# Altium PCB RF315.PcbDoc (part 2 of 3)
Units mm, origin at the board's own origin, x right, y up, seen from the top; angles counter-clockwise.
Board outline 104 x 96 mm, 2 copper layers (Top Layer, Bottom Layer); 249 components, 20 nets, 1048 pads, 153 vias.
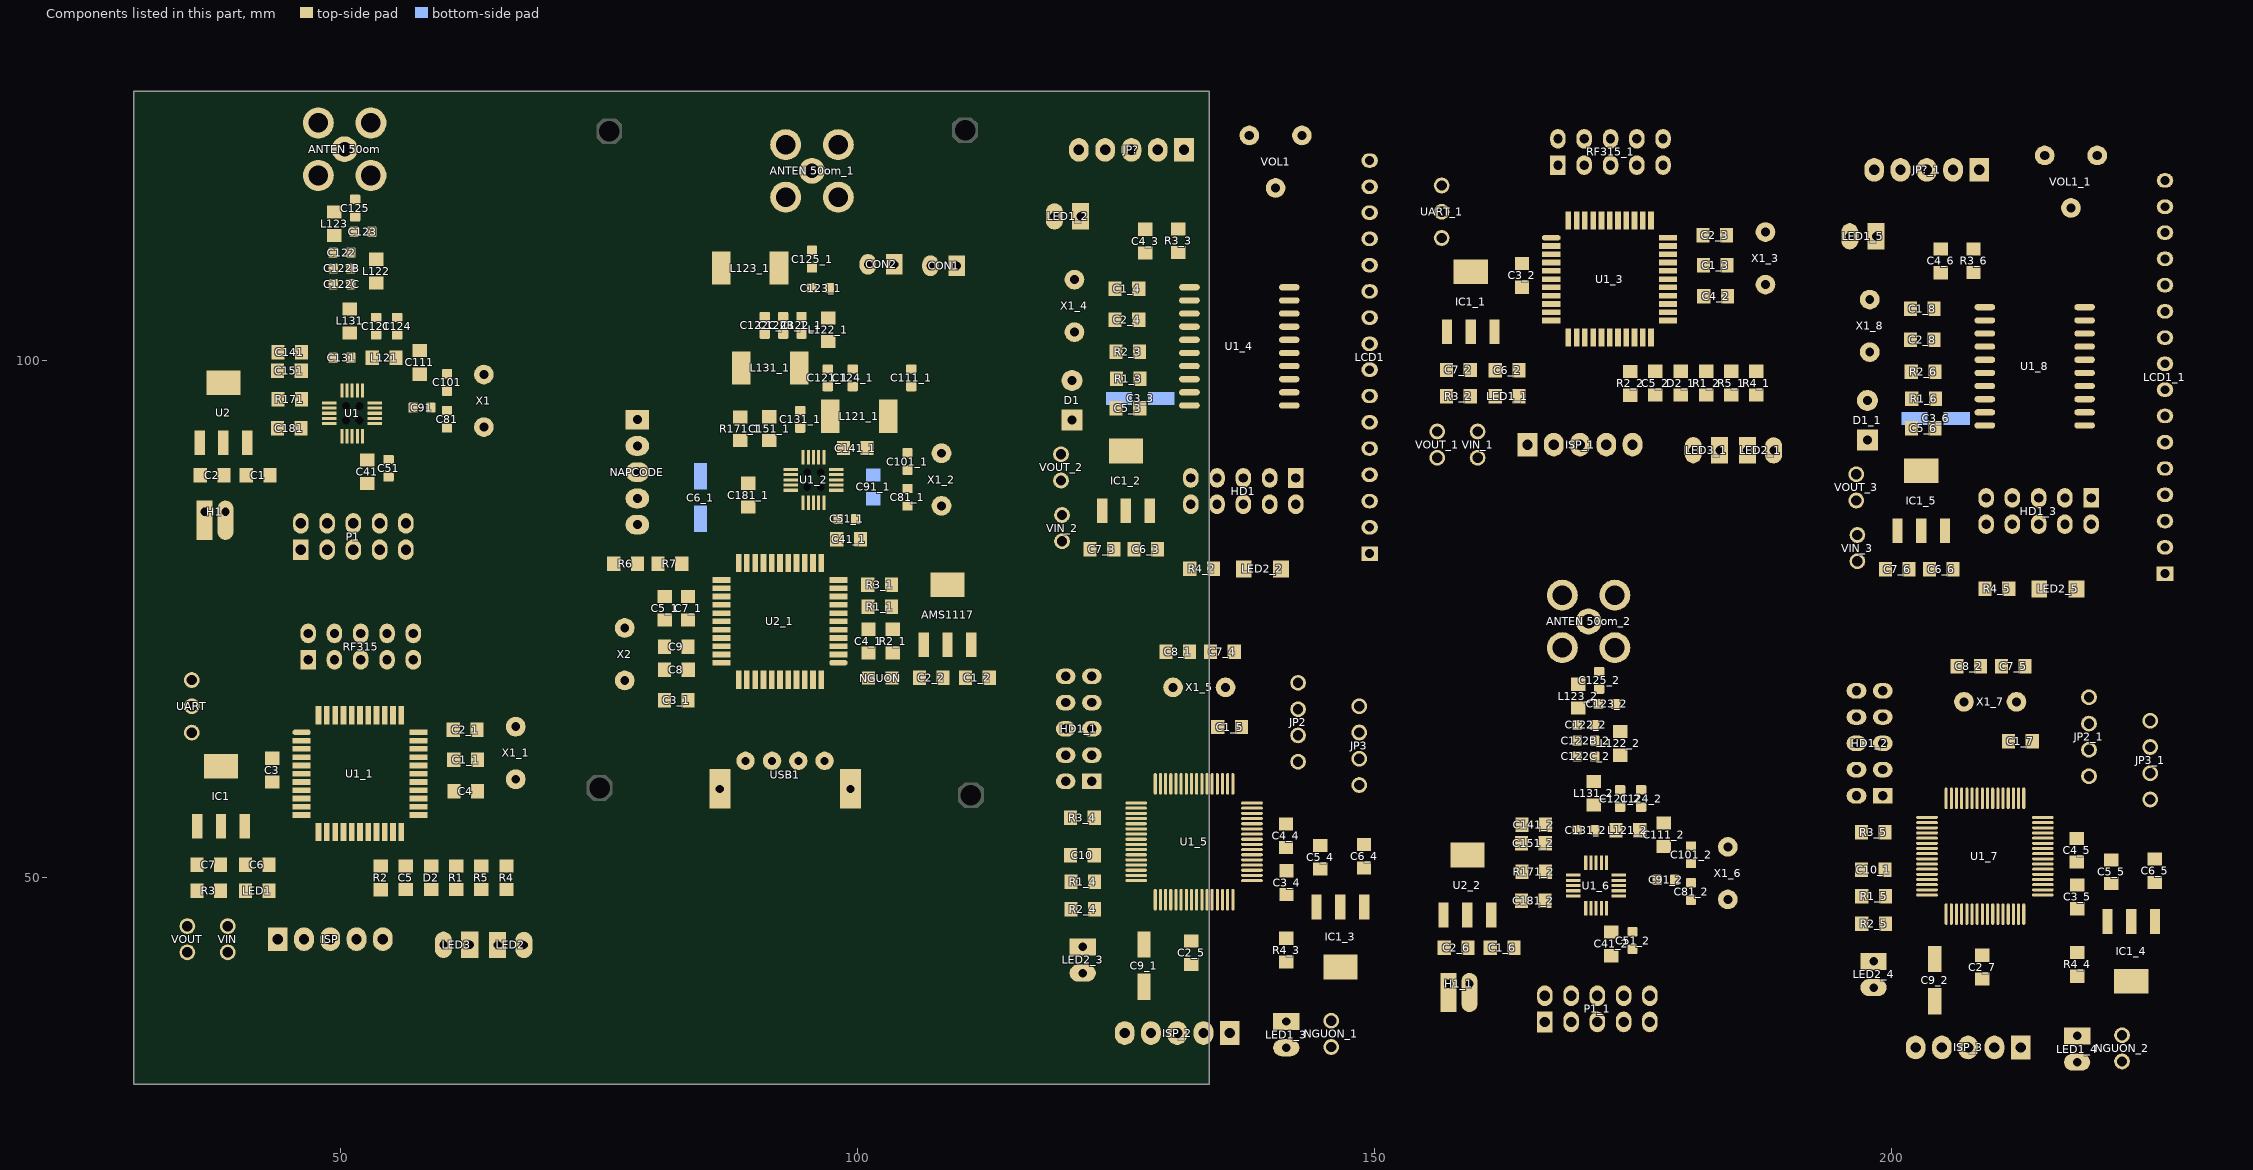
[diagram p2: the components of this part, seen from the top]

## Via types
v1: diameter 1.27, hole 0.711, Top Layer to Bottom Layer, 103 vias
v2: diameter 1.1, hole 0.7, Top Layer to Bottom Layer, 35 vias
v3: diameter 1, hole 0.7, Top Layer to Bottom Layer, 5 vias
v4: diameter 1, hole 0.6, Top Layer to Bottom Layer, 3 vias
v5: diameter 1.2, hole 0.7, Top Layer to Bottom Layer, 2 vias
v6: diameter 1.1, hole 0.711, Top Layer to Bottom Layer, 2 vias
v7: diameter 1, hole 0.711, Top Layer to Bottom Layer, 2 vias
v8: diameter 1.143, hole 0.711, Top Layer to Bottom Layer, 1 vias

## Nets (pads, with @x,y where several pads share a name; then routed paths per layer and width w, separated by ;. In a path a pad name is that pad's centre, name@x,y a point inside that pad or via, vN(x,y) a via of type N, cw(c..) or ccw(c..) an arc to the next point about the centre after c; other vN are vias at no path point) (continued)
copper on no net: | length 5093.7
  Top Layer w0.025: 60.162,118.632 60.238,118.632 ; 60.162,118.657 60.238,118.657 ; 60.162,118.683 60.238,118.683 ; 60.162,118.708 60.238,118.708 ; 60.162,118.733 60.238,118.733 ; 60.162,118.759 60.238,118.759 ; 60.162,118.784 60.238,118.784 ; 60.162,118.81 60.238,118.81 ; 60.162,118.835 60.238,118.835 ; 60.162,118.86 60.238,118.86 ; 60.162,118.886 60.238,118.886 ; 60.162,118.911 60.238,118.911 ; 60.162,118.937 60.238,118.937 ; 60.162,118.962 60.238,118.962 ; 60.162,118.987 60.238,118.987 ; 60.162,119.013 60.238,119.013 ; 60.162,119.038 60.238,119.038 ; 60.162,119.064 60.238,119.064 ; 60.162,119.089 60.238,119.089 ; 60.162,119.114 60.238,119.114 ; 60.162,119.14 60.238,119.14 ; 60.162,119.165 60.238,119.165 ; 60.162,119.191 60.238,119.191 ; 60.162,119.216 60.238,119.216 ; 60.162,119.241 60.238,119.241 ; 60.162,119.267 60.238,119.267 ; 60.162,119.292 60.238,119.292 ; 60.162,119.318 60.238,119.318 ; 60.162,119.343 60.238,119.343 ; 60.162,119.368 60.238,119.368 ; 60.162,119.394 60.238,119.394 ; 60.162,119.419 60.238,119.419 ; 60.162,119.445 60.238,119.445 ; 60.162,119.47 60.238,119.47 ; 60.162,119.495 60.238,119.495 ; 60.162,119.521 60.238,119.521 ; 60.162,119.546 60.238,119.546 ; 60.162,119.572 60.238,119.572 ; 60.162,119.597 60.238,119.597 ; 60.162,119.622 60.238,119.622 ; 60.162,119.648 60.238,119.648 ; 60.162,119.673 60.238,119.673 ; 60.162,119.699 60.238,119.699 ; 60.162,119.724 60.238,119.724 ; 60.162,119.749 60.238,119.749 ; 60.162,119.775 60.238,119.775 ; 60.162,119.8 60.238,119.8 ; 60.162,119.826 60.238,119.826 ; 60.162,119.851 60.238,119.851 ; 60.162,119.876 60.238,119.876 ; 60.162,119.902 60.238,119.902 ; 60.162,119.927 60.238,119.927 ; 60.162,119.953 60.238,119.953 ; 60.162,119.978 60.238,119.978 ; 60.162,120.003 60.238,120.003 ; 60.162,120.029 60.238,120.029 ; 60.162,120.054 60.238,120.054 ; 60.162,120.08 60.238,120.08 ; 60.162,120.105 60.238,120.105 ; 60.162,120.13 60.238,120.13 ; 60.162,120.156 60.238,120.156 ; 60.162,120.181 60.238,120.181 ; 60.162,120.207 60.238,120.207 ; 60.162,120.232 60.238,120.232 ; 60.162,120.257 60.238,120.257 ; 60.162,120.283 60.238,120.283 ; 60.162,120.308 60.238,120.308 ; 60.162,120.334 60.238,120.334 ; 60.162,120.359 60.238,120.359 ; 60.162,120.384 60.238,120.384 ; 60.162,120.41 60.238,120.41 ; 60.162,120.435 60.238,120.435 ; 60.162,120.461 60.238,120.461 ; 60.162,120.486 60.238,120.486 ; 60.162,120.511 60.238,120.511 ; 60.162,120.537 60.238,120.537 ; 60.162,120.562 60.238,120.562 ; 60.162,120.588 60.238,120.588 ; 60.162,120.613 60.238,120.613 ; 60.162,120.638 60.238,120.638 ; 60.162,120.664 60.238,120.664 ; 60.162,120.689 60.238,120.689 ; 60.162,120.715 60.238,120.715 ; 60.162,120.74 60.238,120.74 ; 60.162,120.765 60.238,120.765 ; 60.162,120.791 60.238,120.791 ; 60.162,120.816 60.238,120.816 ; 60.162,120.842 60.238,120.842 ; 60.162,120.867 60.238,120.867 ; 60.162,120.892 60.238,120.892 ; 60.162,120.918 60.238,120.918 ; 60.162,120.943 60.238,120.943 ; 60.162,120.969 60.238,120.969 ; 60.162,120.994 60.238,120.994 ; 60.162,121.019 60.238,121.019 ; 60.162,121.045 60.238,121.045 ; 60.162,121.07 60.238,121.07 ; 60.162,121.096 60.238,121.096 ; 60.162,121.121 60.238,121.121 ; 60.162,121.146 60.238,121.146 ; 60.162,121.172 60.238,121.172 ; 60.162,121.197 60.238,121.197 ; 60.162,121.223 60.238,121.223 ; 60.162,121.248 60.238,121.248 ; 60.162,121.273 60.238,121.273 ; 60.162,121.299 60.238,121.299 ; 60.162,121.324 60.238,121.324 ; 60.162,121.35 60.238,121.35 ; 60.162,121.375 60.238,121.375 ; 60.162,121.4 60.238,121.4 ; 60.162,121.426 60.238,121.426 ; 60.162,121.451 60.238,121.451 ; 60.162,121.477 60.238,121.477 ; 60.162,121.502 60.238,121.502 ; 60.162,121.527 60.238,121.527 ; 60.162,121.553 60.238,121.553 ; 60.162,121.578 60.238,121.578 ; 60.162,121.604 60.238,121.604 ; 60.162,121.629 60.238,121.629 ; 60.162,121.654 60.238,121.654 ; 60.162,121.68 60.238,121.68 ; 60.162,121.705 60.238,121.705 ; 60.162,121.731 60.238,121.731 ; 60.162,121.756 60.238,121.756 ; 60.162,121.781 60.238,121.781 ; 60.162,121.807 60.238,121.807 ; 60.162,121.832 60.238,121.832 ; 60.162,121.858 60.238,121.858 ; 60.162,121.883 60.238,121.883 ; 60.162,121.908 60.238,121.908 ; 60.162,121.934 60.238,121.934 ; 60.162,121.959 60.238,121.959 ; 60.162,121.985 60.238,121.985 ; 60.162,122.01 60.238,122.01 ; 60.162,122.035 60.238,122.035 ; 60.162,122.061 60.238,122.061 ; 60.162,122.086 60.238,122.086 ; 60.162,122.112 60.238,122.112 ; 60.162,122.137 60.238,122.137 ; 60.162,122.162 60.238,122.162 ; 60.162,122.188 60.238,122.188 ; 60.162,122.213 60.238,122.213 ; 60.162,122.239 60.238,122.239 ; 60.162,122.264 60.238,122.264 ; 60.162,122.289 60.238,122.289 ; 60.162,122.315 60.238,122.315 ; 60.162,122.34 60.263,122.34 ; 60.187,118.53 60.289,118.53 ; 60.187,118.556 60.263,118.556 ; 60.187,118.581 60.263,118.581 ; 60.187,118.606 60.263,118.606 ; 60.187,122.366 60.263,122.366 ; 60.187,122.391 60.263,122.391 ; 60.187,122.416 60.289,122.416 ; 60.212,118.479 60.289,118.479 ; 60.212,118.505 60.289,118.505 ; 60.212,122.442 60.289,122.442 ; 60.212,122.467 60.289,122.467 ; 60.212,122.493 60.314,122.493 ; 60.238,118.429 60.314,118.429 ; 60.238,118.454 60.314,118.454 ; 60.238,122.518 60.314,122.518 ; 60.238,122.543 60.339,122.543 ; 60.263,118.378 60.365,118.378 ; 60.263,118.403 60.339,118.403 ; 60.263,122.569 60.339,122.569 ; 60.263,122.594 60.365,122.594 ; 60.289,118.327 60.39,118.327 ; 60.289,118.352 60.365,118.352 ; 60.289,122.62 60.39,122.62 ; 60.314,118.302 60.416,118.302 ; 60.314,122.645 60.416,122.645 ; 60.314,122.67 60.416,122.67 ; 60.339,118.251 60.441,118.251 ; 60.339,118.276 60.441,118.276 ; 60.339,122.696 60.441,122.696 ; 60.365,118.225 60.466,118.225 ; 60.365,122.721 60.466,122.721 ; 60.39,118.2 60.517,118.2 ; 60.39,122.747 60.492,122.747 ; 60.416,118.175 60.543,118.175 ; 60.416,122.772 60.543,122.772 ; 60.441,118.149 60.568,118.149 ; 60.441,122.797 60.568,122.797 ; 60.466,122.823 60.593,122.823 ; 60.492,118.124 60.619,118.124 ; 60.492,122.848 60.644,122.848 ; 60.517,118.098 60.644,118.098 ; 60.543,118.073 60.72,118.073 ; 60.543,122.874 60.695,122.874 ; 60.568,122.899 60.771,122.899 ; 60.593,118.048 60.771,118.048 ; 60.593,122.264 61.152,122.264 ; 60.593,122.289 61.127,122.289 ; 60.593,122.315 61.101,122.315 ; 60.593,122.34 61.101,122.34 ; 60.593,122.366 61.101,122.366 ; 60.593,122.391 61.101,122.391 ; 60.593,122.416 61.076,122.416 ; 60.619,122.213 61.203,122.213 ; 60.619,122.239 61.178,122.239 ; 60.619,122.442 61.076,122.442 ; 60.619,122.467 61.051,122.467 ; 60.619,122.924 60.847,122.924 ; 60.644,118.022 60.873,118.022 ; 60.644,122.162 61.254,122.162 ; 60.644,122.188 61.228,122.188 ; 60.644,122.493 61.051,122.493 ; 60.67,118.454 60.746,118.454 ; 60.67,118.479 60.898,118.479 ; 60.67,118.505 61.051,118.505 ; 60.67,118.53 61.203,118.53 ; 60.67,118.556 61.228,118.556 ; 60.67,122.137 61.279,122.137 ; 60.67,122.518 61.025,122.518 ; 60.67,122.95 64.708,122.95 ; 60.695,117.997 64.708,117.997 ; 60.695,118.581 61.254,118.581 ; 60.695,118.606 61.279,118.606 ; 60.695,118.632 61.305,118.632 ; 60.695,118.657 61.33,118.657 ; 60.695,118.683 61.355,118.683 ; 60.695,118.708 61.381,118.708 ; 60.695,122.543 60.974,122.543 ; 60.72,118.733 61.406,118.733 ; 60.72,118.759 61.432,118.759 ; 60.72,118.784 61.457,118.784 ; 60.72,118.81 61.482,118.81 ; 60.72,118.835 61.508,118.835 ; 60.72,118.86 61.533,118.86 ; 60.72,122.112 61.305,122.112 ; 60.746,118.886 61.559,118.886 ; 60.746,118.911 61.584,118.911 ; 60.746,118.937 61.609,118.937 ; 60.746,118.962 61.635,118.962 ; 60.746,122.569 60.924,122.569 ; 60.746,122.975 64.657,122.975 ; 60.771,117.971 64.632,117.971 ; 60.771,118.987 61.66,118.987 ; 60.771,122.086 61.33,122.086 ; 60.797,119.013 61.686,119.013 ; 60.822,119.038 61.711,119.038 ; 60.822,123.001 64.556,123.001 ; 60.847,117.946 64.53,117.946 ; 60.847,119.064 61.736,119.064 ; 60.847,120.842 60.898,120.842 ; 60.873,119.089 61.762,119.089 ; 60.873,120.867 60.974,120.867 ; 60.873,122.061 61.355,122.061 ; 60.898,119.114 61.787,119.114 ; 60.898,120.892 61.051,120.892 ; 60.898,122.035 61.381,122.035 ; 60.924,119.14 61.813,119.14 ; 60.924,120.918 61.127,120.918 ; 60.924,122.01 61.406,122.01 ; 60.949,119.165 61.838,119.165 ; 60.949,120.943 61.203,120.943 ; 60.949,121.985 61.432,121.985 ; 60.974,119.191 61.863,119.191 ; 60.974,120.969 61.254,120.969 ; 60.974,121.959 61.457,121.959 ; 61,119.216 61.889,119.216 ; 61,120.994 61.33,120.994 ; 61,121.934 61.482,121.934 ; 61.025,119.241 61.914,119.241 ; 61.025,121.019 61.406,121.019 ; 61.025,121.908 61.508,121.908 ; 61.051,119.267 61.94,119.267 ; 61.051,121.045 61.432,121.045 ; 61.051,121.883 61.533,121.883 ; 61.076,119.292 61.965,119.292 ; 61.076,121.07 61.457,121.07 ; 61.076,121.858 61.559,121.858 ; 61.101,119.318 61.99,119.318 ; 61.101,121.096 61.482,121.096 ; 61.101,121.832 61.584,121.832 ; 61.127,119.343 62.016,119.343 ; 61.127,121.121 61.508,121.121 ; 61.127,121.807 61.609,121.807 ; 61.152,119.368 62.041,119.368 ; 61.152,121.146 61.533,121.146 ; 61.152,121.781 61.635,121.781 ; 61.178,119.394 62.067,119.394 ; 61.178,121.172 62.448,121.172 ; 61.178,121.756 61.66,121.756 ; 61.203,119.419 62.092,119.419 ; 61.203,121.197 62.422,121.197 ; 61.203,121.731 61.686,121.731 ; 61.228,119.445 62.117,119.445 ; 61.228,121.223 62.397,121.223 ; 61.228,121.705 62.092,121.705 ; 61.254,119.47 62.143,119.47 ; 61.254,121.248 62.371,121.248 ; 61.254,121.68 62.067,121.68 ; 61.279,119.495 62.168,119.495 ; 61.279,121.273 62.346,121.273 ; 61.279,121.654 62.041,121.654 ; 61.305,119.521 62.194,119.521 ; 61.305,121.299 62.321,121.299 ; 61.305,121.629 62.016,121.629 ; 61.33,119.546 62.219,119.546 ; 61.33,121.324 62.295,121.324 ; 61.33,121.604 62.016,121.604 ; 61.355,119.572 62.244,119.572 ; 61.355,121.35 62.27,121.35 ; 61.355,121.578 62.041,121.578 ; 61.381,119.597 62.27,119.597 ; 61.381,121.375 62.244,121.375 ; 61.381,121.553 62.067,121.553 ; 61.406,119.622 62.295,119.622 ; 61.406,121.4 62.219,121.4 ; 61.406,121.527 62.092,121.527 ; 61.432,119.648 62.321,119.648 ; 61.432,121.426 62.194,121.426 ; 61.432,121.502 62.117,121.502 ; 61.457,119.673 62.346,119.673 ; 61.457,121.451 62.168,121.451 ; 61.457,121.477 62.143,121.477 ; 61.482,119.699 62.371,119.699 ; 61.508,119.724 62.397,119.724 ; 61.533,119.749 62.422,119.749 ; 61.559,119.775 62.448,119.775 ; 61.584,119.8 62.473,119.8 ; 61.584,121.146 62.473,121.146 ; 61.609,119.826 62.498,119.826 ; 61.609,121.121 62.498,121.121 ; 61.635,119.851 62.524,119.851 ; 61.635,121.096 62.524,121.096 ; 61.66,119.876 62.549,119.876 ; 61.66,121.07 62.549,121.07 ; 61.686,119.902 62.575,119.902 ; 61.686,121.045 62.575,121.045 ; 61.711,119.927 62.6,119.927 ; 61.711,121.019 62.6,121.019 ; 61.736,119.953 62.625,119.953 ; 61.736,120.994 62.625,120.994 ; 61.736,121.731 62.117,121.731 ; 61.762,119.978 62.651,119.978 ; 61.762,120.969 62.651,120.969 ; 61.762,121.756 62.143,121.756 ; 61.787,120.003 62.676,120.003 ; 61.787,120.943 62.676,120.943 ; 61.787,121.781 62.168,121.781 ; 61.813,120.029 63.591,120.029 ; 61.813,120.918 63.591,120.918 ; 61.813,121.807 62.168,121.807 ; 61.838,120.054 63.565,120.054 ; 61.838,120.892 63.565,120.892 ; 61.838,121.832 62.168,121.832 ; 61.863,120.08 63.54,120.08 ; 61.863,120.867 63.54,120.867 ; 61.863,121.858 62.194,121.858 ; 61.889,120.105 63.514,120.105 ; 61.889,120.842 63.514,120.842 ; 61.889,121.883 62.194,121.883 ; 61.914,120.13 63.489,120.13 ; 61.914,120.816 63.489,120.816 ; 61.914,121.908 62.194,121.908 ; 61.94,120.156 63.464,120.156 ; 61.94,120.791 63.464,120.791 ; 61.94,121.934 62.219,121.934 ; 61.965,120.181 63.438,120.181 ; 61.965,120.765 63.438,120.765 ; 61.965,121.959 62.219,121.959 ; 61.99,120.207 63.413,120.207 ; 61.99,120.74 63.413,120.74 ; 61.99,121.985 62.244,121.985 ; 62.016,120.232 63.387,120.232 ; 62.016,120.715 63.387,120.715 ; 62.016,122.01 62.244,122.01 ; 62.041,120.257 63.362,120.257 ; 62.041,120.689 63.362,120.689 ; 62.041,122.035 62.244,122.035 ; 62.067,120.283 63.337,120.283 ; 62.067,120.664 63.337,120.664 ; 62.067,122.061 62.27,122.061 ; 62.092,120.308 63.311,120.308 ; 62.092,120.638 63.311,120.638 ; 62.092,122.086 62.27,122.086 ; 62.117,120.334 63.286,120.334 ; 62.117,120.613 63.286,120.613 ; 62.117,122.112 62.27,122.112 ; 62.143,120.359 63.26,120.359 ; 62.143,120.588 63.26,120.588 ; 62.143,122.137 62.295,122.137 ; 62.168,120.384 63.235,120.384 ; 62.168,120.562 63.235,120.562 ; 62.168,122.162 62.295,122.162 ; 62.194,120.41 63.21,120.41 ; 62.194,120.537 63.21,120.537 ; 62.194,122.188 62.295,122.188 ; 62.219,120.435 63.184,120.435 ; 62.219,120.511 63.184,120.511 ; 62.219,122.213 62.321,122.213 ; 62.244,120.461 63.159,120.461 ; 62.244,120.486 63.159,120.486 ; 62.244,122.239 62.321,122.239 ; 62.27,122.264 62.321,122.264 ; 62.295,122.289 62.346,122.289 ; 62.321,122.315 62.346,122.315 ; 62.727,120.003 63.616,120.003 ; 62.727,120.943 63.616,120.943 ; 62.752,119.978 63.641,119.978 ; 62.752,120.969 63.641,120.969 ; 62.778,119.953 63.667,119.953 ; 62.778,120.994 63.667,120.994 ; 62.803,119.927 63.692,119.927 ; 62.803,121.019 63.692,121.019 ; 62.829,119.902 63.718,119.902 ; 62.829,121.045 63.718,121.045 ; 62.854,119.876 63.743,119.876 ; 62.854,121.07 63.743,121.07 ; 62.879,119.851 63.768,119.851 ; 62.879,121.096 63.768,121.096 ; 62.905,119.826 63.794,119.826 ; 62.905,121.121 63.794,121.121 ; 62.93,119.8 63.819,119.8 ; 62.93,121.146 63.819,121.146 ; 62.956,119.775 63.845,119.775 ; 62.956,121.172 64.226,121.172 ; 62.981,119.749 63.87,119.749 ; 62.981,121.197 64.2,121.197 ; 63.006,119.724 63.895,119.724 ; 63.006,121.223 64.175,121.223 ; 63.032,119.699 63.921,119.699 ; 63.032,121.248 64.149,121.248 ; 63.057,119.673 63.946,119.673 ; 63.057,121.273 64.124,121.273 ; 63.057,122.264 63.133,122.264 ; 63.057,122.289 63.108,122.289 ; 63.057,122.315 63.083,122.315 ; 63.083,119.648 63.972,119.648 ; 63.083,121.299 64.099,121.299 ; 63.083,122.213 63.184,122.213 ; 63.083,122.239 63.159,122.239 ; 63.108,119.622 63.997,119.622 ; 63.108,121.324 64.073,121.324 ; 63.108,122.137 63.26,122.137 ; 63.108,122.162 63.235,122.162 ; 63.108,122.188 63.21,122.188 ; 63.133,119.597 64.022,119.597 ; 63.133,121.35 64.048,121.35 ; 63.133,122.061 63.337,122.061 ; 63.133,122.086 63.311,122.086 ; 63.133,122.112 63.286,122.112 ; 63.159,119.572 64.048,119.572 ; 63.159,121.375 64.022,121.375 ; 63.159,121.985 63.413,121.985 ; 63.159,122.01 63.387,122.01 ; 63.159,122.035 63.362,122.035 ; 63.184,119.546 64.073,119.546 ; 63.184,121.4 63.997,121.4 ; 63.184,121.908 63.489,121.908 ; 63.184,121.934 63.464,121.934 ; 63.184,121.959 63.438,121.959 ; 63.21,119.521 64.099,119.521 ; 63.21,121.426 63.972,121.426 ; 63.21,121.832 63.565,121.832 ; 63.21,121.858 63.54,121.858 ; 63.21,121.883 63.514,121.883 ; 63.235,119.495 64.124,119.495 ; 63.235,121.451 63.946,121.451 ; 63.235,121.756 63.641,121.756 ; 63.235,121.781 63.616,121.781 ; 63.235,121.807 63.591,121.807 ; 63.26,119.47 64.149,119.47 ; 63.26,121.477 63.946,121.477 ; 63.26,121.731 63.667,121.731 ; 63.286,119.445 64.175,119.445 ; 63.286,121.502 63.972,121.502 ; 63.286,121.705 64.175,121.705 ; 63.311,119.419 64.2,119.419 ; 63.311,121.527 63.997,121.527 ; 63.311,121.68 64.149,121.68 ; 63.337,119.394 64.226,119.394 ; 63.337,121.553 64.022,121.553 ; 63.337,121.654 64.124,121.654 ; 63.362,119.368 64.251,119.368 ; 63.362,121.578 64.048,121.578 ; 63.362,121.629 64.099,121.629 ; 63.387,119.343 64.276,119.343 ; 63.387,121.604 64.073,121.604 ; 63.413,119.318 64.302,119.318 ; 63.438,119.292 64.327,119.292 ; 63.464,119.267 64.353,119.267 ; 63.489,119.241 64.378,119.241 ; 63.514,119.216 64.403,119.216 ; 63.54,119.191 64.429,119.191 ; 63.565,119.165 64.454,119.165 ; 63.591,119.14 64.48,119.14 ; 63.616,119.114 64.505,119.114 ; 63.641,119.089 64.53,119.089 ; 63.667,119.064 64.556,119.064 ; 63.692,119.038 64.581,119.038 ; 63.718,119.013 64.607,119.013 ; 63.718,121.731 64.2,121.731 ; 63.743,118.987 64.632,118.987 ; 63.743,121.756 64.226,121.756 ; 63.768,118.962 64.657,118.962 ; 63.768,121.781 64.251,121.781 ; 63.794,118.937 64.657,118.937 ; 63.794,121.807 64.276,121.807 ; 63.819,118.911 64.657,118.911 ; 63.819,121.832 64.302,121.832 ; 63.845,118.886 64.657,118.886 ; 63.845,121.146 64.251,121.146 ; 63.845,121.858 64.327,121.858 ; 63.87,118.86 64.657,118.86 ; 63.87,121.121 64.276,121.121 ; 63.87,121.883 64.353,121.883 ; 63.895,118.835 64.683,118.835 ; 63.895,121.096 64.302,121.096 ; 63.895,121.908 64.378,121.908 ; 63.921,118.81 64.683,118.81 ; 63.921,121.07 64.327,121.07 ; 63.921,121.934 64.403,121.934 ; 63.946,118.784 64.683,118.784 ; 63.946,121.045 64.353,121.045 ; 63.946,121.959 64.429,121.959 ; 63.972,118.759 64.683,118.759 ; 63.972,121.985 64.454,121.985 ; 63.997,118.733 64.683,118.733 ; 63.997,121.019 64.378,121.019 ; 63.997,122.01 64.48,122.01 ; 64.022,118.708 64.683,118.708 ; 64.022,122.035 64.505,122.035 ; 64.048,118.683 64.708,118.683 ; 64.048,120.994 64.403,120.994 ; 64.048,122.061 64.53,122.061 ; 64.073,118.657 64.708,118.657 ; 64.073,122.086 64.632,122.086 ; 64.099,118.632 64.708,118.632 ; 64.099,122.112 64.683,122.112 ; 64.124,118.606 64.708,118.606 ; 64.124,120.969 64.429,120.969 ; 64.124,122.137 64.708,122.137 ; 64.149,118.581 64.708,118.581 ; 64.149,122.162 64.734,122.162 ; 64.175,118.556 64.708,118.556 ; 64.175,122.188 64.759,122.188 ; 64.2,118.53 64.734,118.53 ; 64.2,120.943 64.454,120.943 ; 64.2,122.213 64.784,122.213 ; 64.226,122.239 64.784,122.239 ; 64.251,122.264 64.81,122.264 ; 64.276,120.918 64.48,120.918 ; 64.276,122.289 64.81,122.289 ; 64.302,122.315 64.81,122.315 ; 64.302,122.34 64.81,122.34 ; 64.302,122.366 64.81,122.366 ; 64.302,122.391 64.81,122.391 ; 64.302,122.416 64.784,122.416 ; 64.327,118.505 64.734,118.505 ; 64.327,122.442 64.784,122.442 ; 64.327,122.467 64.759,122.467 ; 64.353,120.892 64.505,120.892 ; 64.353,122.493 64.759,122.493 ; 64.378,122.518 64.734,122.518 ; 64.403,122.543 64.683,122.543 ; 64.429,120.867 64.53,120.867 ; 64.454,122.569 64.632,122.569 ; 64.48,118.479 64.734,118.479 ; 64.505,120.842 64.53,120.842 ; 64.53,118.022 64.759,118.022 ; 64.556,122.924 64.784,122.924 ; 64.632,118.048 64.81,118.048 ; 64.632,118.454 64.734,118.454 ; 64.632,122.899 64.81,122.899 ; 64.683,118.073 64.861,118.073 ; 64.708,122.874 64.861,122.874 ; 64.734,118.098 64.886,118.098 ; 64.759,122.848 64.886,122.848 ; 64.784,118.124 64.911,118.124 ; 64.784,122.823 64.937,122.823 ; 64.835,118.149 64.937,118.149 ; 64.835,122.797 64.962,122.797 ; 64.861,118.175 64.988,118.175 ; 64.861,122.772 64.988,122.772 ; 64.886,118.2 65.013,118.2 ; 64.886,122.747 65.013,122.747 ; 64.911,118.225 65.013,118.225 ; 64.937,118.251 65.038,118.251 ; 64.937,122.721 65.038,122.721 ; 64.962,118.276 65.064,118.276 ; 64.962,122.67 65.064,122.67 ; 64.962,122.696 65.064,122.696 ; 64.988,118.302 65.089,118.302 ; 64.988,122.645 65.089,122.645 ; 65.013,118.327 65.115,118.327 ; 65.013,122.62 65.115,122.62 ; 65.038,118.352 65.115,118.352 ; 65.038,118.378 65.14,118.378 ; 65.038,122.569 65.14,122.569 ; 65.038,122.594 65.115,122.594 ; 65.064,118.403 65.14,118.403 ; 65.064,118.429 65.165,118.429 ; 65.064,122.543 65.14,122.543 ; 65.089,118.454 65.165,118.454 ; 65.089,118.479 65.191,118.479 ; 65.089,122.467 65.191,122.467 ; 65.089,122.493 65.165,122.493 ; 65.089,122.518 65.165,122.518 ; 65.115,118.505 65.191,118.505 ; 65.115,118.53 65.191,118.53 ; 65.115,122.416 65.191,122.416 ; 65.115,122.442 65.191,122.442 ; 65.14,118.556 65.216,118.556 ; 65.14,118.581 65.216,118.581 ; 65.14,118.606 65.216,118.606 ; 65.14,118.632 65.216,118.632 ; 65.14,122.315 65.242,122.315 ; 65.14,122.34 65.216,122.34 ; 65.14,122.366 65.216,122.366 ; 65.14,122.391 65.216,122.391 ; 65.165,118.657 65.242,118.657 ; 65.165,118.683 65.242,118.683 ; 65.165,118.708 65.242,118.708 ; 65.165,118.733 65.242,118.733 ; 65.165,118.759 65.242,118.759 ; 65.165,118.784 65.242,118.784 ; 65.165,118.81 65.242,118.81 ; 65.165,118.835 65.242,118.835 ; 65.165,118.86 65.242,118.86 ; 65.165,118.886 65.242,118.886 ; 65.165,118.911 65.242,118.911 ; 65.165,118.937 65.242,118.937 ; 65.165,118.962 65.242,118.962 ; 65.165,118.987 65.242,118.987 ; 65.165,119.013 65.242,119.013 ; 65.165,119.038 65.242,119.038 ; 65.165,119.064 65.242,119.064 ; 65.165,119.089 65.242,119.089 ; 65.165,119.114 65.242,119.114 ; 65.165,119.14 65.242,119.14 ; 65.165,119.165 65.242,119.165 ; 65.165,119.191 65.242,119.191 ; 65.165,119.216 65.242,119.216 ; 65.165,119.241 65.242,119.241 ; 65.165,119.267 65.242,119.267 ; 65.165,119.292 65.242,119.292 ; 65.165,119.318 65.242,119.318 ; 65.165,119.343 65.242,119.343 ; 65.165,119.368 65.242,119.368 ; 65.165,119.394 65.242,119.394 ; 65.165,119.419 65.242,119.419 ; 65.165,119.445 65.242,119.445 ; 65.165,119.47 65.242,119.47 ; 65.165,119.495 65.242,119.495 ; 65.165,119.521 65.242,119.521 ; 65.165,119.546 65.242,119.546 ; 65.165,119.572 65.242,119.572 ; 65.165,119.597 65.242,119.597 ; 65.165,119.622 65.242,119.622 ; 65.165,119.648 65.242,119.648 ; 65.165,119.673 65.242,119.673 ; 65.165,119.699 65.242,119.699 ; 65.165,119.724 65.242,119.724 ; 65.165,119.749 65.242,119.749 ; 65.165,119.775 65.242,119.775 ; 65.165,119.8 65.242,119.8 ; 65.165,119.826 65.242,119.826 ; 65.165,119.851 65.242,119.851 ; 65.165,119.876 65.242,119.876 ; 65.165,119.902 65.242,119.902 ; 65.165,119.927 65.242,119.927 ; 65.165,119.953 65.242,119.953 ; 65.165,119.978 65.242,119.978 ; 65.165,120.003 65.242,120.003 ; 65.165,120.029 65.242,120.029 ; 65.165,120.054 65.242,120.054 ; 65.165,120.08 65.242,120.08 ; 65.165,120.105 65.242,120.105 ; 65.165,120.13 65.242,120.13 ; 65.165,120.156 65.242,120.156 ; 65.165,120.181 65.242,120.181 ; 65.165,120.207 65.242,120.207 ; 65.165,120.232 65.242,120.232 ; 65.165,120.257 65.242,120.257 ; 65.165,120.283 65.242,120.283 ; 65.165,120.308 65.242,120.308 ; 65.165,120.334 65.242,120.334 ; 65.165,120.359 65.242,120.359 ; 65.165,120.384 65.242,120.384 ; 65.165,120.41 65.242,120.41 ; 65.165,120.435 65.242,120.435 ; 65.165,120.461 65.242,120.461 ; 65.165,120.486 65.242,120.486 ; 65.165,120.511 65.242,120.511 ; 65.165,120.537 65.242,120.537 ; 65.165,120.562 65.242,120.562 ; 65.165,120.588 65.242,120.588 ; 65.165,120.613 65.242,120.613 ; 65.165,120.638 65.242,120.638 ; 65.165,120.664 65.242,120.664 ; 65.165,120.689 65.242,120.689 ; 65.165,120.715 65.242,120.715 ; 65.165,120.74 65.242,120.74 ; 65.165,120.765 65.242,120.765 ; 65.165,120.791 65.242,120.791 ; 65.165,120.816 65.242,120.816 ; 65.165,120.842 65.242,120.842 ; 65.165,120.867 65.242,120.867 ; 65.165,120.892 65.242,120.892 ; 65.165,120.918 65.242,120.918 ; 65.165,120.943 65.242,120.943 ; 65.165,120.969 65.242,120.969 ; 65.165,120.994 65.242,120.994 ; 65.165,121.019 65.242,121.019 ; 65.165,121.045 65.242,121.045 ; 65.165,121.07 65.242,121.07 ; 65.165,121.096 65.242,121.096 ; 65.165,121.121 65.242,121.121 ; 65.165,121.146 65.242,121.146 ; 65.165,121.172 65.242,121.172 ; 65.165,121.197 65.242,121.197 ; 65.165,121.223 65.242,121.223 ; 65.165,121.248 65.242,121.248 ; 65.165,121.273 65.242,121.273 ; 65.165,121.299 65.242,121.299 ; 65.165,121.324 65.242,121.324 ; 65.165,121.35 65.242,121.35 ; 65.165,121.375 65.242,121.375 ; 65.165,121.4 65.242,121.4 ; 65.165,121.426 65.242,121.426 ; 65.165,121.451 65.242,121.451 ; 65.165,121.477 65.242,121.477 ; 65.165,121.502 65.242,121.502 ; 65.165,121.527 65.242,121.527 ; 65.165,121.553 65.242,121.553 ; 65.165,121.578 65.242,121.578 ; 65.165,121.604 65.242,121.604 ; 65.165,121.629 65.242,121.629 ; 65.165,121.654 65.242,121.654 ; 65.165,121.68 65.242,121.68 ; 65.165,121.705 65.242,121.705 ; 65.165,121.731 65.242,121.731 ; 65.165,121.756 65.242,121.756 ; 65.165,121.781 65.242,121.781 ; 65.165,121.807 65.242,121.807 ; 65.165,121.832 65.242,121.832 ; 65.165,121.858 65.242,121.858 ; 65.165,121.883 65.242,121.883 ; 65.165,121.908 65.242,121.908 ; 65.165,121.934 65.242,121.934 ; 65.165,121.959 65.242,121.959 ; 65.165,121.985 65.242,121.985 ; 65.165,122.01 65.242,122.01 ; 65.165,122.035 65.242,122.035 ; 65.165,122.061 65.242,122.061 ; 65.165,122.086 65.242,122.086 ; 65.165,122.112 65.242,122.112 ; 65.165,122.137 65.242,122.137 ; 65.165,122.162 65.242,122.162 ; 65.165,122.188 65.242,122.188 ; 65.165,122.213 65.242,122.213 ; 65.165,122.239 65.242,122.239 ; 65.165,122.264 65.242,122.264 ; 65.165,122.289 65.242,122.289 ; 180.456,72.963 180.532,72.963 ; 180.456,72.988 180.532,72.988 ; 180.456,73.013 180.532,73.013 ; 180.456,73.039 180.532,73.039 ; 180.456,73.064 180.532,73.064 ; 180.456,73.09 180.532,73.09 ; 180.456,73.115 180.532,73.115 ; 180.456,73.14 180.532,73.14 ; 180.456,73.166 180.532,73.166 ; 180.456,73.191 180.532,73.191 ; 180.456,73.217 180.532,73.217 ; 180.456,73.242 180.532,73.242 ; 180.456,73.267 180.532,73.267 ; 180.456,73.293 180.532,73.293 ; 180.456,73.318 180.532,73.318 ; 180.456,73.344 180.532,73.344 ; 180.456,73.369 180.532,73.369 ; 180.456,73.394 180.532,73.394 ; 180.456,73.42 180.532,73.42 ; 180.456,73.445 180.532,73.445 ; 180.456,73.471 180.532,73.471 ; 180.456,73.496 180.532,73.496 ; 180.456,73.521 180.532,73.521 ; 180.456,73.547 180.532,73.547 ; 180.456,73.572 180.532,73.572 ; 180.456,73.598 180.532,73.598 ; 180.456,73.623 180.532,73.623 ; 180.456,73.648 180.532,73.648 ; 180.456,73.674 180.532,73.674 ; 180.456,73.699 180.532,73.699 ; 180.456,73.725 180.532,73.725 ; 180.456,73.75 180.532,73.75 ; 180.456,73.775 180.532,73.775 ; 180.456,73.801 180.532,73.801 ; 180.456,73.826 180.532,73.826 ; 180.456,73.852 180.532,73.852 ; 180.456,73.877 180.532,73.877 ; 180.456,73.902 180.532,73.902 ; 180.456,73.928 180.532,73.928 ; 180.456,73.953 180.532,73.953 ; 180.456,73.979 180.532,73.979 ; 180.456,74.004 180.532,74.004 ; 180.456,74.029 180.532,74.029 ; 180.456,74.055 180.532,74.055 ; 180.456,74.08 180.532,74.08 ; 180.456,74.106 180.532,74.106 ; 180.456,74.131 180.532,74.131 ; 180.456,74.156 180.532,74.156 ; 180.456,74.182 180.532,74.182 ; 180.456,74.207 180.532,74.207 ; 180.456,74.233 180.532,74.233 ; 180.456,74.258 180.532,74.258 ; 180.456,74.283 180.532,74.283 ; 180.456,74.309 180.532,74.309 ; 180.456,74.334 180.532,74.334 ; 180.456,74.36 180.532,74.36 ; 180.456,74.385 180.532,74.385 ; 180.456,74.41 180.532,74.41 ; 180.456,74.436 180.532,74.436 ; 180.456,74.461 180.532,74.461 ; 180.456,74.487 180.532,74.487 ; 180.456,74.512 180.532,74.512 ; 180.456,74.537 180.532,74.537 ; 180.456,74.563 180.532,74.563 ; 180.456,74.588 180.532,74.588 ; 180.456,74.614 180.532,74.614 ; 180.456,74.639 180.532,74.639 ; 180.456,74.664 180.532,74.664 ; 180.456,74.69 180.532,74.69 ; 180.456,74.715 180.532,74.715 ; 180.456,74.741 180.532,74.741 ; 180.456,74.766 180.532,74.766 ; 180.456,74.791 180.532,74.791 ; 180.456,74.817 180.532,74.817 ; 180.456,74.842 180.532,74.842 ; 180.456,74.868 180.532,74.868 ; 180.456,74.893 180.532,74.893 ; 180.456,74.918 180.532,74.918 ; 180.456,74.944 180.532,74.944 ; 180.456,74.969 180.532,74.969 ; 180.456,74.995 180.532,74.995 ; 180.456,75.02 180.532,75.02 ; 180.456,75.045 180.532,75.045 ; 180.456,75.071 180.532,75.071 ; 180.456,75.096 180.532,75.096 ; 180.456,75.122 180.532,75.122 ; 180.456,75.147 180.532,75.147 ; 180.456,75.172 180.532,75.172 ; 180.456,75.198 180.532,75.198 ; 180.456,75.223 180.532,75.223 ; 180.456,75.249 180.532,75.249 ; 180.456,75.274 180.532,75.274 ; 180.456,75.299 180.532,75.299 ; 180.456,75.325 180.532,75.325 ; 180.456,75.35 180.532,75.35 ; 180.456,75.376 180.532,75.376 ; 180.456,75.401 180.532,75.401 ; 180.456,75.426 180.532,75.426 ; 180.456,75.452 180.532,75.452 ; 180.456,75.477 180.532,75.477 ; 180.456,75.503 180.532,75.503 ; 180.456,75.528 180.532,75.528 ; 180.456,75.553 180.532,75.553 ; 180.456,75.579 180.532,75.579 ; 180.456,75.604 180.532,75.604 ; 180.456,75.63 180.532,75.63 ; 180.456,75.655 180.532,75.655 ; 180.456,75.68 180.532,75.68 ; 180.456,75.706 180.532,75.706 ; 180.456,75.731 180.532,75.731 ; 180.456,75.757 180.532,75.757 ; 180.456,75.782 180.532,75.782 ; 180.456,75.807 180.532,75.807 ; 180.456,75.833 180.532,75.833 ; 180.456,75.858 180.532,75.858 ; 180.456,75.884 180.532,75.884 ; 180.456,75.909 180.532,75.909 ; 180.456,75.934 180.532,75.934 ; 180.456,75.96 180.532,75.96 ; 180.456,75.985 180.532,75.985 ; 180.456,76.011 180.532,76.011 ; 180.456,76.036 180.532,76.036 ; 180.456,76.061 180.532,76.061 ; 180.456,76.087 180.532,76.087 ; 180.456,76.112 180.532,76.112 ; 180.456,76.138 180.532,76.138 ; 180.456,76.163 180.532,76.163 ; 180.456,76.188 180.532,76.188 ; 180.456,76.214 180.532,76.214 ; 180.456,76.239 180.532,76.239 ; 180.456,76.265 180.532,76.265 ; 180.456,76.29 180.532,76.29 ; 180.456,76.315 180.532,76.315 ; 180.456,76.341 180.532,76.341 ; 180.456,76.366 180.532,76.366 ; 180.456,76.392 180.532,76.392 ; 180.456,76.417 180.532,76.417 ; 180.456,76.442 180.532,76.442 ; 180.456,76.468 180.532,76.468 ; 180.456,76.493 180.532,76.493 ; 180.456,76.519 180.532,76.519 ; 180.456,76.544 180.532,76.544 ; 180.456,76.569 180.532,76.569 ; 180.456,76.595 180.532,76.595 ; 180.456,76.62 180.532,76.62 ; 180.456,76.646 180.532,76.646 ; 180.456,76.671 180.558,76.671 ; 180.481,72.861 180.583,72.861 ; 180.481,72.886 180.558,72.886 ; 180.481,72.912 180.558,72.912 ; 180.481,72.937 180.558,72.937 ; 180.481,76.696 180.558,76.696 ; 180.481,76.722 180.558,76.722 ; 180.481,76.747 180.583,76.747 ; 180.507,72.81 180.583,72.81 ; 180.507,72.836 180.583,72.836 ; 180.507,76.773 180.583,76.773 ; 180.507,76.798 180.583,76.798 ; 180.507,76.823 180.608,76.823 ; 180.532,72.759 180.608,72.759 ; 180.532,72.785 180.608,72.785 ; 180.532,76.849 180.608,76.849 ; 180.532,76.874 180.634,76.874 ; 180.558,72.709 180.659,72.709 ; 180.558,72.734 180.634,72.734 ; 180.558,76.9 180.634,76.9 ; 180.558,76.925 180.659,76.925 ; 180.583,72.658 180.685,72.658 ; 180.583,72.683 180.659,72.683 ; 180.583,76.95 180.685,76.95 ; 180.608,72.632 180.71,72.632 ; 180.608,76.976 180.71,76.976 ; 180.608,77.001 180.71,77.001 ; 180.634,72.582 180.735,72.582 ; 180.634,72.607 180.735,72.607 ; 180.634,77.027 180.735,77.027 ; 180.659,72.556 180.761,72.556 ; 180.659,77.052 180.761,77.052 ; 180.685,72.531 180.812,72.531 ; 180.685,77.077 180.786,77.077 ; 180.71,72.505 180.837,72.505 ; 180.71,77.103 180.837,77.103 ; 180.735,72.48 180.862,72.48 ; 180.735,77.128 180.862,77.128 ; 180.761,77.154 180.888,77.154 ; 180.786,72.455 180.913,72.455 ; 180.786,77.179 180.939,77.179 ; 180.812,72.429 180.939,72.429 ; 180.837,72.404 181.015,72.404 ; 180.837,77.204 180.989,77.204 ; 180.862,77.23 181.066,77.23 ; 180.888,72.378 181.066,72.378 ; 180.888,76.595 181.447,76.595 ; 180.888,76.62 181.421,76.62 ; 180.888,76.646 181.396,76.646 ; 180.888,76.671 181.396,76.671 ; 180.888,76.696 181.396,76.696 ; 180.888,76.722 181.396,76.722 ; 180.888,76.747 181.37,76.747 ; 180.913,76.544 181.497,76.544 ; 180.913,76.569 181.472,76.569 ; 180.913,76.773 181.37,76.773 ; 180.913,76.798 181.345,76.798 ; 180.913,77.255 181.142,77.255 ; 180.939,72.353 181.167,72.353 ; 180.939,76.493 181.548,76.493 ; 180.939,76.519 181.523,76.519 ; 180.939,76.823 181.345,76.823 ; 180.964,72.785 181.04,72.785 ; 180.964,72.81 181.193,72.81 ; 180.964,72.836 181.345,72.836 ; 180.964,72.861 181.497,72.861 ; 180.964,72.886 181.523,72.886 ; 180.964,76.468 181.574,76.468 ; 180.964,76.849 181.32,76.849 ; 180.964,77.281 185.003,77.281 ; 180.989,72.328 185.003,72.328 ; 180.989,72.912 181.548,72.912 ; 180.989,72.937 181.574,72.937 ; 180.989,72.963 181.599,72.963 ; 180.989,72.988 181.624,72.988 ; 180.989,73.013 181.65,73.013 ; 180.989,73.039 181.675,73.039 ; 180.989,76.874 181.269,76.874 ; 181.015,73.064 181.701,73.064 ; 181.015,73.09 181.726,73.09 ; 181.015,73.115 181.751,73.115 ; 181.015,73.14 181.777,73.14 ; 181.015,73.166 181.802,73.166 ; 181.015,73.191 181.828,73.191 ; 181.015,76.442 181.599,76.442 ; 181.04,73.217 181.853,73.217 ; 181.04,73.242 181.878,73.242 ; 181.04,73.267 181.904,73.267 ; 181.04,73.293 181.929,73.293 ; 181.04,76.9 181.218,76.9 ; 181.04,77.306 184.952,77.306 ; 181.066,72.302 184.926,72.302 ; 181.066,73.318 181.955,73.318 ; 181.066,76.417 181.624,76.417 ; 181.091,73.344 181.98,73.344 ; 181.116,73.369 182.005,73.369 ; 181.116,77.331 184.85,77.331 ; 181.142,72.277 184.825,72.277 ; 181.142,73.394 182.031,73.394 ; 181.142,75.172 181.193,75.172 ; 181.167,73.42 182.056,73.42 ; 181.167,75.198 181.269,75.198 ; 181.167,76.392 181.65,76.392 ; 181.193,73.445 182.082,73.445 ; 181.193,75.223 181.345,75.223 ; 181.193,76.366 181.675,76.366 ; 181.218,73.471 182.107,73.471 ; 181.218,75.249 181.421,75.249 ; 181.218,76.341 181.701,76.341 ; 181.243,73.496 182.132,73.496 ; 181.243,75.274 181.497,75.274 ; 181.243,76.315 181.726,76.315 ; 181.269,73.521 182.158,73.521 ; 181.269,75.299 181.548,75.299 ; 181.269,76.29 181.751,76.29 ; 181.294,73.547 182.183,73.547 ; 181.294,75.325 181.624,75.325 ; 181.294,76.265 181.777,76.265 ; 181.32,73.572 182.209,73.572 ; 181.32,75.35 181.701,75.35 ; 181.32,76.239 181.802,76.239 ; 181.345,73.598 182.234,73.598 ; 181.345,75.376 181.726,75.376 ; 181.345,76.214 181.828,76.214 ; 181.37,73.623 182.259,73.623 ; 181.37,75.401 181.751,75.401 ; 181.37,76.188 181.853,76.188 ; 181.396,73.648 182.285,73.648 ; 181.396,75.426 181.777,75.426 ; 181.396,76.163 181.878,76.163 ; 181.421,73.674 182.31,73.674 ; 181.421,75.452 181.802,75.452 ; 181.421,76.138 181.904,76.138 ; 181.447,73.699 182.336,73.699 ; 181.447,75.477 181.828,75.477 ; 181.447,76.112 181.929,76.112 ; 181.472,73.725 182.361,73.725 ; 181.472,75.503 182.742,75.503 ; 181.472,76.087 181.955,76.087 ; 181.497,73.75 182.386,73.75 ; 181.497,75.528 182.717,75.528 ; 181.497,76.061 181.98,76.061 ; 181.523,73.775 182.412,73.775 ; 181.523,75.553 182.691,75.553 ; 181.523,76.036 182.386,76.036 ; 181.548,73.801 182.437,73.801 ; 181.548,75.579 182.666,75.579 ; 181.548,76.011 182.361,76.011 ; 181.574,73.826 182.463,73.826 ; 181.574,75.604 182.64,75.604 ; 181.574,75.985 182.336,75.985 ; 181.599,73.852 182.488,73.852 ; 181.599,75.63 182.615,75.63 ; 181.599,75.96 182.31,75.96 ; 181.624,73.877 182.513,73.877 ; 181.624,75.655 182.59,75.655 ; 181.624,75.934 182.31,75.934 ; 181.65,73.902 182.539,73.902 ; 181.65,75.68 182.564,75.68 ; 181.65,75.909 182.336,75.909 ; 181.675,73.928 182.564,73.928 ; 181.675,75.706 182.539,75.706 ; 181.675,75.884 182.361,75.884 ; 181.701,73.953 182.59,73.953 ; 181.701,75.731 182.513,75.731 ; 181.701,75.858 182.386,75.858 ; 181.726,73.979 182.615,73.979 ; 181.726,75.757 182.488,75.757 ; 181.726,75.833 182.412,75.833 ; 181.751,74.004 182.64,74.004 ; 181.751,75.782 182.463,75.782 ; 181.751,75.807 182.437,75.807 ; 181.777,74.029 182.666,74.029 ; 181.802,74.055 182.691,74.055 ; 181.828,74.08 182.717,74.08 ; 181.853,74.106 182.742,74.106 ; 181.878,74.131 182.767,74.131 ; 181.878,75.477 182.767,75.477 ; 181.904,74.156 182.793,74.156 ; 181.904,75.452 182.793,75.452 ; 181.929,74.182 182.818,74.182 ; 181.929,75.426 182.818,75.426 ; 181.955,74.207 182.844,74.207 ; 181.955,75.401 182.844,75.401 ; 181.98,74.233 182.869,74.233 ; 181.98,75.376 182.869,75.376 ; 182.005,74.258 182.894,74.258 ; 182.005,75.35 182.894,75.35 ; 182.031,74.283 182.92,74.283 ; 182.031,75.325 182.92,75.325 ; 182.031,76.061 182.412,76.061 ; 182.056,74.309 182.945,74.309 ; 182.056,75.299 182.945,75.299 ; 182.056,76.087 182.437,76.087 ; 182.082,74.334 182.971,74.334 ; 182.082,75.274 182.971,75.274 ; 182.082,76.112 182.463,76.112 ; 182.107,74.36 183.885,74.36 ; 182.107,75.249 183.885,75.249 ; 182.107,76.138 182.463,76.138 ; 182.132,74.385 183.86,74.385 ; 182.132,75.223 183.86,75.223 ; 182.132,76.163 182.463,76.163 ; 182.158,74.41 183.834,74.41 ; 182.158,75.198 183.834,75.198 ; 182.158,76.188 182.488,76.188 ; 182.183,74.436 183.809,74.436 ; 182.183,75.172 183.809,75.172 ; 182.183,76.214 182.488,76.214 ; 182.209,74.461 183.783,74.461 ; 182.209,75.147 183.783,75.147 ; 182.209,76.239 182.488,76.239 ; 182.234,74.487 183.758,74.487 ; 182.234,75.122 183.758,75.122 ; 182.234,76.265 182.513,76.265 ; 182.259,74.512 183.733,74.512 ; 182.259,75.096 183.733,75.096 ; 182.259,76.29 182.513,76.29 ; 182.285,74.537 183.707,74.537 ; 182.285,75.071 183.707,75.071 ; 182.285,76.315 182.539,76.315 ; 182.31,74.563 183.682,74.563 ; 182.31,75.045 183.682,75.045 ; 182.31,76.341 182.539,76.341 ; 182.336,74.588 183.656,74.588 ; 182.336,75.02 183.656,75.02 ; 182.336,76.366 182.539,76.366 ; 182.361,74.614 183.631,74.614 ; 182.361,74.995 183.631,74.995 ; 182.361,76.392 182.564,76.392 ; 182.386,74.639 183.606,74.639 ; 182.386,74.969 183.606,74.969 ; 182.386,76.417 182.564,76.417 ; 182.412,74.664 183.58,74.664 ; 182.412,74.944 183.58,74.944 ; 182.412,76.442 182.564,76.442 ; 182.437,74.69 183.555,74.69 ; 182.437,74.918 183.555,74.918 ; 182.437,76.468 182.59,76.468 ; 182.463,74.715 183.529,74.715 ; 182.463,74.893 183.529,74.893 ; 182.463,76.493 182.59,76.493 ; 182.488,74.741 183.504,74.741 ; 182.488,74.868 183.504,74.868 ; 182.488,76.519 182.59,76.519 ; 182.513,74.766 183.479,74.766 ; 182.513,74.842 183.479,74.842 ; 182.513,76.544 182.615,76.544 ; 182.539,74.791 183.453,74.791 ; 182.539,74.817 183.453,74.817 ; 182.539,76.569 182.615,76.569 ; 182.564,76.595 182.615,76.595 ; 182.59,76.62 182.64,76.62 ; 182.615,76.646 182.64,76.646 ; 183.021,74.334 183.91,74.334 ; 183.021,75.274 183.91,75.274 ; 183.047,74.309 183.936,74.309 ; 183.047,75.299 183.936,75.299 ; 183.072,74.283 183.961,74.283 ; 183.072,75.325 183.961,75.325 ; 183.098,74.258 183.987,74.258 ; 183.098,75.35 183.987,75.35 ; 183.123,74.233 184.012,74.233 ; 183.123,75.376 184.012,75.376 ; 183.148,74.207 184.037,74.207 ; 183.148,75.401 184.037,75.401 ; 183.174,74.182 184.063,74.182 ; 183.174,75.426 184.063,75.426 ; 183.199,74.156 184.088,74.156 ; 183.199,75.452 184.088,75.452 ; 183.225,74.131 184.114,74.131 ; 183.225,75.477 184.114,75.477 ; 183.25,74.106 184.139,74.106 ; 183.25,75.503 184.52,75.503 ; 183.275,74.08 184.164,74.08 ; 183.275,75.528 184.495,75.528 ; 183.301,74.055 184.19,74.055 ; 183.301,75.553 184.469,75.553 ; 183.326,74.029 184.215,74.029 ; 183.326,75.579 184.444,75.579 ; 183.352,74.004 184.241,74.004 ; 183.352,75.604 184.418,75.604 ; 183.352,76.595 183.428,76.595 ; 183.352,76.62 183.402,76.62 ; 183.352,76.646 183.377,76.646 ; 183.377,73.979 184.266,73.979 ; 183.377,75.63 184.393,75.63 ; 183.377,76.544 183.479,76.544 ; 183.377,76.569 183.453,76.569 ; 183.402,73.953 184.291,73.953 ; 183.402,75.655 184.368,75.655 ; 183.402,76.468 183.555,76.468 ; 183.402,76.493 183.529,76.493 ; 183.402,76.519 183.504,76.519 ; 183.428,73.928 184.317,73.928 ; 183.428,75.68 184.342,75.68 ; 183.428,76.392 183.631,76.392 ; 183.428,76.417 183.606,76.417 ; 183.428,76.442 183.58,76.442 ; 183.453,73.902 184.342,73.902 ; 183.453,75.706 184.317,75.706 ; 183.453,76.315 183.707,76.315 ; 183.453,76.341 183.682,76.341 ; 183.453,76.366 183.656,76.366 ; 183.479,73.877 184.368,73.877 ; 183.479,75.731 184.291,75.731 ; 183.479,76.239 183.783,76.239 ; 183.479,76.265 183.758,76.265 ; 183.479,76.29 183.733,76.29 ; 183.504,73.852 184.393,73.852 ; 183.504,75.757 184.266,75.757 ; 183.504,76.163 183.86,76.163 ; 183.504,76.188 183.834,76.188 ; 183.504,76.214 183.809,76.214 ; 183.529,73.826 184.418,73.826 ; 183.529,75.782 184.241,75.782 ; 183.529,76.087 183.936,76.087 ; 183.529,76.112 183.91,76.112 ; 183.529,76.138 183.885,76.138 ; 183.555,73.801 184.444,73.801 ; 183.555,75.807 184.241,75.807 ; 183.555,76.061 183.961,76.061 ; 183.58,73.775 184.469,73.775 ; 183.58,75.833 184.266,75.833 ; 183.58,76.036 184.469,76.036 ; 183.606,73.75 184.495,73.75 ; 183.606,75.858 184.291,75.858 ; 183.606,76.011 184.444,76.011 ; 183.631,73.725 184.52,73.725 ; 183.631,75.884 184.317,75.884 ; 183.631,75.985 184.418,75.985 ; 183.656,73.699 184.545,73.699 ; 183.656,75.909 184.342,75.909 ; 183.656,75.96 184.393,75.96 ; 183.682,73.674 184.571,73.674 ; 183.682,75.934 184.368,75.934 ; 183.707,73.648 184.596,73.648 ; 183.733,73.623 184.622,73.623 ; 183.758,73.598 184.647,73.598 ; 183.783,73.572 184.672,73.572 ; 183.809,73.547 184.698,73.547 ; 183.834,73.521 184.723,73.521 ; 183.86,73.496 184.749,73.496 ; 183.885,73.471 184.774,73.471 ; 183.91,73.445 184.799,73.445 ; 183.936,73.42 184.825,73.42 ; 183.961,73.394 184.85,73.394 ; 183.987,73.369 184.876,73.369 ; 184.012,73.344 184.901,73.344 ; 184.012,76.061 184.495,76.061 ; 184.037,73.318 184.926,73.318 ; 184.037,76.087 184.52,76.087 ; 184.063,73.293 184.952,73.293 ; 184.063,76.112 184.545,76.112 ; 184.088,73.267 184.952,73.267 ; 184.088,76.138 184.571,76.138 ; 184.114,73.242 184.952,73.242 ; 184.114,76.163 184.596,76.163 ; 184.139,73.217 184.952,73.217 ; 184.139,75.477 184.545,75.477 ; 184.139,76.188 184.622,76.188 ; 184.164,73.191 184.952,73.191 ; 184.164,75.452 184.571,75.452 ; 184.164,76.214 184.647,76.214 ; 184.19,73.166 184.977,73.166 ; 184.19,75.426 184.596,75.426 ; 184.19,76.239 184.672,76.239 ; 184.215,73.14 184.977,73.14 ; 184.215,75.401 184.622,75.401 ; 184.215,76.265 184.698,76.265 ; 184.241,73.115 184.977,73.115 ; 184.241,75.376 184.647,75.376 ; 184.241,76.29 184.723,76.29 ; 184.266,73.09 184.977,73.09 ; 184.266,76.315 184.749,76.315 ; 184.291,73.064 184.977,73.064 ; 184.291,75.35 184.672,75.35 ; 184.291,76.341 184.774,76.341 ; 184.317,73.039 184.977,73.039 ; 184.317,76.366 184.799,76.366 ; 184.342,73.013 185.003,73.013 ; 184.342,75.325 184.698,75.325 ; 184.342,76.392 184.825,76.392 ; 184.368,72.988 185.003,72.988 ; 184.368,76.417 184.926,76.417 ; 184.393,72.963 185.003,72.963 ; 184.393,76.442 184.977,76.442 ; 184.418,72.937 185.003,72.937 ; 184.418,75.299 184.723,75.299 ; 184.418,76.468 185.003,76.468 ; 184.444,72.912 185.003,72.912 ; 184.444,76.493 185.028,76.493 ; 184.469,72.886 185.003,72.886 ; 184.469,76.519 185.053,76.519 ; 184.495,72.861 185.028,72.861 ; 184.495,75.274 184.749,75.274 ; 184.495,76.544 185.079,76.544 ; 184.52,76.569 185.079,76.569 ; 184.545,76.595 185.104,76.595 ; 184.571,75.249 184.774,75.249 ; 184.571,76.62 185.104,76.62 ; 184.596,76.646 185.104,76.646 ; 184.596,76.671 185.104,76.671 ; 184.596,76.696 185.104,76.696 ; 184.596,76.722 185.104,76.722 ; 184.596,76.747 185.079,76.747 ; 184.622,72.836 185.028,72.836 ; 184.622,76.773 185.079,76.773 ; 184.622,76.798 185.053,76.798 ; 184.647,75.223 184.799,75.223 ; 184.647,76.823 185.053,76.823 ; 184.672,76.849 185.028,76.849 ; 184.698,76.874 184.977,76.874 ; 184.723,75.198 184.825,75.198 ; 184.749,76.9 184.926,76.9 ; 184.774,72.81 185.028,72.81 ; 184.799,75.172 184.825,75.172 ; 184.825,72.353 185.053,72.353 ; 184.85,77.255 185.079,77.255 ; 184.926,72.378 185.104,72.378 ; 184.926,72.785 185.028,72.785 ; 184.926,77.23 185.104,77.23 ; 184.977,72.404 185.155,72.404 ; 185.003,77.204 185.155,77.204 ; 185.028,72.429 185.18,72.429 ; 185.053,77.179 185.18,77.179 ; 185.079,72.455 185.206,72.455 ; 185.079,77.154 185.231,77.154 ; 185.13,72.48 185.231,72.48 ; 185.13,77.128 185.257,77.128 ; 185.155,72.505 185.282,72.505 ; 185.155,77.103 185.282,77.103 ; 185.18,72.531 185.307,72.531 ; 185.18,77.077 185.307,77.077 ; 185.206,72.556 185.307,72.556 ; 185.231,72.582 185.333,72.582 ; 185.231,77.052 185.333,77.052 ; 185.257,72.607 185.358,72.607 ; 185.257,77.001 185.358,77.001 ; 185.257,77.027 185.358,77.027 ; 185.282,72.632 185.384,72.632 ; 185.282,76.976 185.384,76.976 ; 185.307,72.658 185.409,72.658 ; 185.307,76.95 185.409,76.95 ; 185.333,72.683 185.409,72.683 ; 185.333,72.709 185.434,72.709 ; 185.333,76.9 185.434,76.9 ; 185.333,76.925 185.409,76.925 ; 185.358,72.734 185.434,72.734 ; 185.358,72.759 185.46,72.759 ; 185.358,76.874 185.434,76.874 ; 185.384,72.785 185.46,72.785 ; 185.384,72.81 185.485,72.81 ; 185.384,76.798 185.485,76.798 ; 185.384,76.823 185.46,76.823 ; 185.384,76.849 185.46,76.849 ; 185.409,72.836 185.485,72.836 ; 185.409,72.861 185.485,72.861 ; 185.409,76.747 185.485,76.747 ; 185.409,76.773 185.485,76.773 ; 185.434,72.886 185.511,72.886 ; 185.434,72.912 185.511,72.912 ; 185.434,72.937 185.511,72.937 ; 185.434,72.963 185.511,72.963 ; 185.434,76.646 185.536,76.646 ; 185.434,76.671 185.511,76.671 ; 185.434,76.696 185.511,76.696 ; 185.434,76.722 185.511,76.722 ; 185.46,72.988 185.536,72.988 ; 185.46,73.013 185.536,73.013 ; 185.46,73.039 185.536,73.039 ; 185.46,73.064 185.536,73.064 ; 185.46,73.09 185.536,73.09 ; 185.46,73.115 185.536,73.115 ; 185.46,73.14 185.536,73.14 ; 185.46,73.166 185.536,73.166 ; 185.46,73.191 185.536,73.191 ; 185.46,73.217 185.536,73.217 ; 185.46,73.242 185.536,73.242 ; 185.46,73.267 185.536,73.267 ; 185.46,73.293 185.536,73.293 ; 185.46,73.318 185.536,73.318 ; 185.46,73.344 185.536,73.344 ; 185.46,73.369 185.536,73.369 ; 185.46,73.394 185.536,73.394 ; 185.46,73.42 185.536,73.42 ; 185.46,73.445 185.536,73.445 ; 185.46,73.471 185.536,73.471 ; 185.46,73.496 185.536,73.496 ; 185.46,73.521 185.536,73.521 ; 185.46,73.547 185.536,73.547 ; 185.46,73.572 185.536,73.572 ; 185.46,73.598 185.536,73.598 ; 185.46,73.623 185.536,73.623 ; 185.46,73.648 185.536,73.648 ; 185.46,73.674 185.536,73.674 ; 185.46,73.699 185.536,73.699 ; 185.46,73.725 185.536,73.725 ; 185.46,73.75 185.536,73.75 ; 185.46,73.775 185.536,73.775 ; 185.46,73.801 185.536,73.801 ; 185.46,73.826 185.536,73.826 ; 185.46,73.852 185.536,73.852 ; 185.46,73.877 185.536,73.877 ; 185.46,73.902 185.536,73.902 ; 185.46,73.928 185.536,73.928 ; 185.46,73.953 185.536,73.953 ; 185.46,73.979 185.536,73.979 ; 185.46,74.004 185.536,74.004 ; 185.46,74.029 185.536,74.029 ; 185.46,74.055 185.536,74.055 ; 185.46,74.08 185.536,74.08 ; 185.46,74.106 185.536,74.106 ; 185.46,74.131 185.536,74.131 ; 185.46,74.156 185.536,74.156 ; 185.46,74.182 185.536,74.182 ; 185.46,74.207 185.536,74.207 ; 185.46,74.233 185.536,74.233 ; 185.46,74.258 185.536,74.258 ; 185.46,74.283 185.536,74.283 ; 185.46,74.309 185.536,74.309 ; 185.46,74.334 185.536,74.334 ; 185.46,74.36 185.536,74.36 ; 185.46,74.385 185.536,74.385 ; 185.46,74.41 185.536,74.41 ; 185.46,74.436 185.536,74.436 ; 185.46,74.461 185.536,74.461 ; 185.46,74.487 185.536,74.487 ; 185.46,74.512 185.536,74.512 ; 185.46,74.537 185.536,74.537 ; 185.46,74.563 185.536,74.563 ; 185.46,74.588 185.536,74.588 ; 185.46,74.614 185.536,74.614 ; 185.46,74.639 185.536,74.639 ; 185.46,74.664 185.536,74.664 ; 185.46,74.69 185.536,74.69 ; 185.46,74.715 185.536,74.715 ; 185.46,74.741 185.536,74.741 ; 185.46,74.766 185.536,74.766 ; 185.46,74.791 185.536,74.791 ; 185.46,74.817 185.536,74.817 ; 185.46,74.842 185.536,74.842 ; 185.46,74.868 185.536,74.868 ; 185.46,74.893 185.536,74.893 ; 185.46,74.918 185.536,74.918 ; 185.46,74.944 185.536,74.944 ; 185.46,74.969 185.536,74.969 ; 185.46,74.995 185.536,74.995 ; 185.46,75.02 185.536,75.02 ; 185.46,75.045 185.536,75.045 ; 185.46,75.071 185.536,75.071 ; 185.46,75.096 185.536,75.096 ; 185.46,75.122 185.536,75.122 ; 185.46,75.147 185.536,75.147 ; 185.46,75.172 185.536,75.172 ; 185.46,75.198 185.536,75.198 ; 185.46,75.223 185.536,75.223 ; 185.46,75.249 185.536,75.249 ; 185.46,75.274 185.536,75.274 ; 185.46,75.299 185.536,75.299 ; 185.46,75.325 185.536,75.325 ; 185.46,75.35 185.536,75.35 ; 185.46,75.376 185.536,75.376 ; 185.46,75.401 185.536,75.401 ; 185.46,75.426 185.536,75.426 ; 185.46,75.452 185.536,75.452 ; 185.46,75.477 185.536,75.477 ; 185.46,75.503 185.536,75.503 ; 185.46,75.528 185.536,75.528 ; 185.46,75.553 185.536,75.553 ; 185.46,75.579 185.536,75.579 ; 185.46,75.604 185.536,75.604 ; 185.46,75.63 185.536,75.63 ; 185.46,75.655 185.536,75.655 ; 185.46,75.68 185.536,75.68 ; 185.46,75.706 185.536,75.706 ; 185.46,75.731 185.536,75.731 ; 185.46,75.757 185.536,75.757 ; 185.46,75.782 185.536,75.782 ; 185.46,75.807 185.536,75.807 ; 185.46,75.833 185.536,75.833 ; 185.46,75.858 185.536,75.858 ; 185.46,75.884 185.536,75.884 ; 185.46,75.909 185.536,75.909 ; 185.46,75.934 185.536,75.934 ; 185.46,75.96 185.536,75.96 ; 185.46,75.985 185.536,75.985 ; 185.46,76.011 185.536,76.011 ; 185.46,76.036 185.536,76.036 ; 185.46,76.061 185.536,76.061 ; 185.46,76.087 185.536,76.087 ; 185.46,76.112 185.536,76.112 ; 185.46,76.138 185.536,76.138 ; 185.46,76.163 185.536,76.163 ; 185.46,76.188 185.536,76.188 ; 185.46,76.214 185.536,76.214 ; 185.46,76.239 185.536,76.239 ; 185.46,76.265 185.536,76.265 ; 185.46,76.29 185.536,76.29 ; 185.46,76.315 185.536,76.315 ; 185.46,76.341 185.536,76.341 ; 185.46,76.366 185.536,76.366 ; 185.46,76.392 185.536,76.392 ; 185.46,76.417 185.536,76.417 ; 185.46,76.442 185.536,76.442 ; 185.46,76.468 185.536,76.468 ; 185.46,76.493 185.536,76.493 ; 185.46,76.519 185.536,76.519 ; 185.46,76.544 185.536,76.544 ; 185.46,76.569 185.536,76.569 ; 185.46,76.595 185.536,76.595 ; 185.46,76.62 185.536,76.62